# EAGLE board Print (EAGLE 9.5.0)
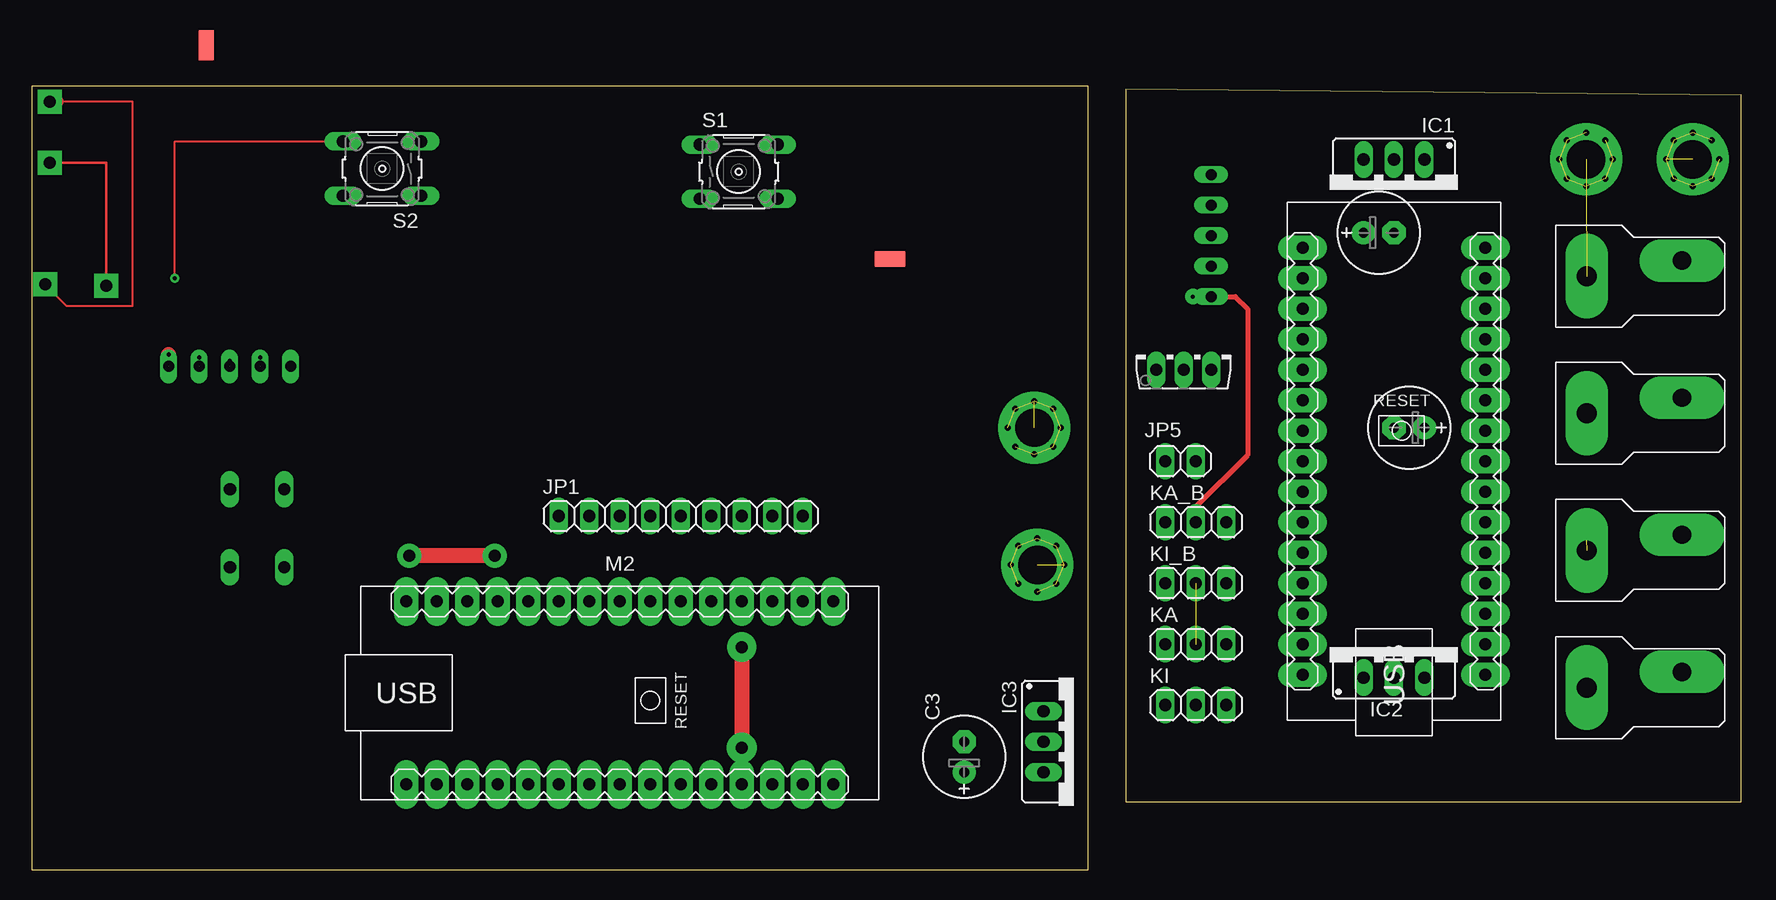
[diagram p0: board, top side]
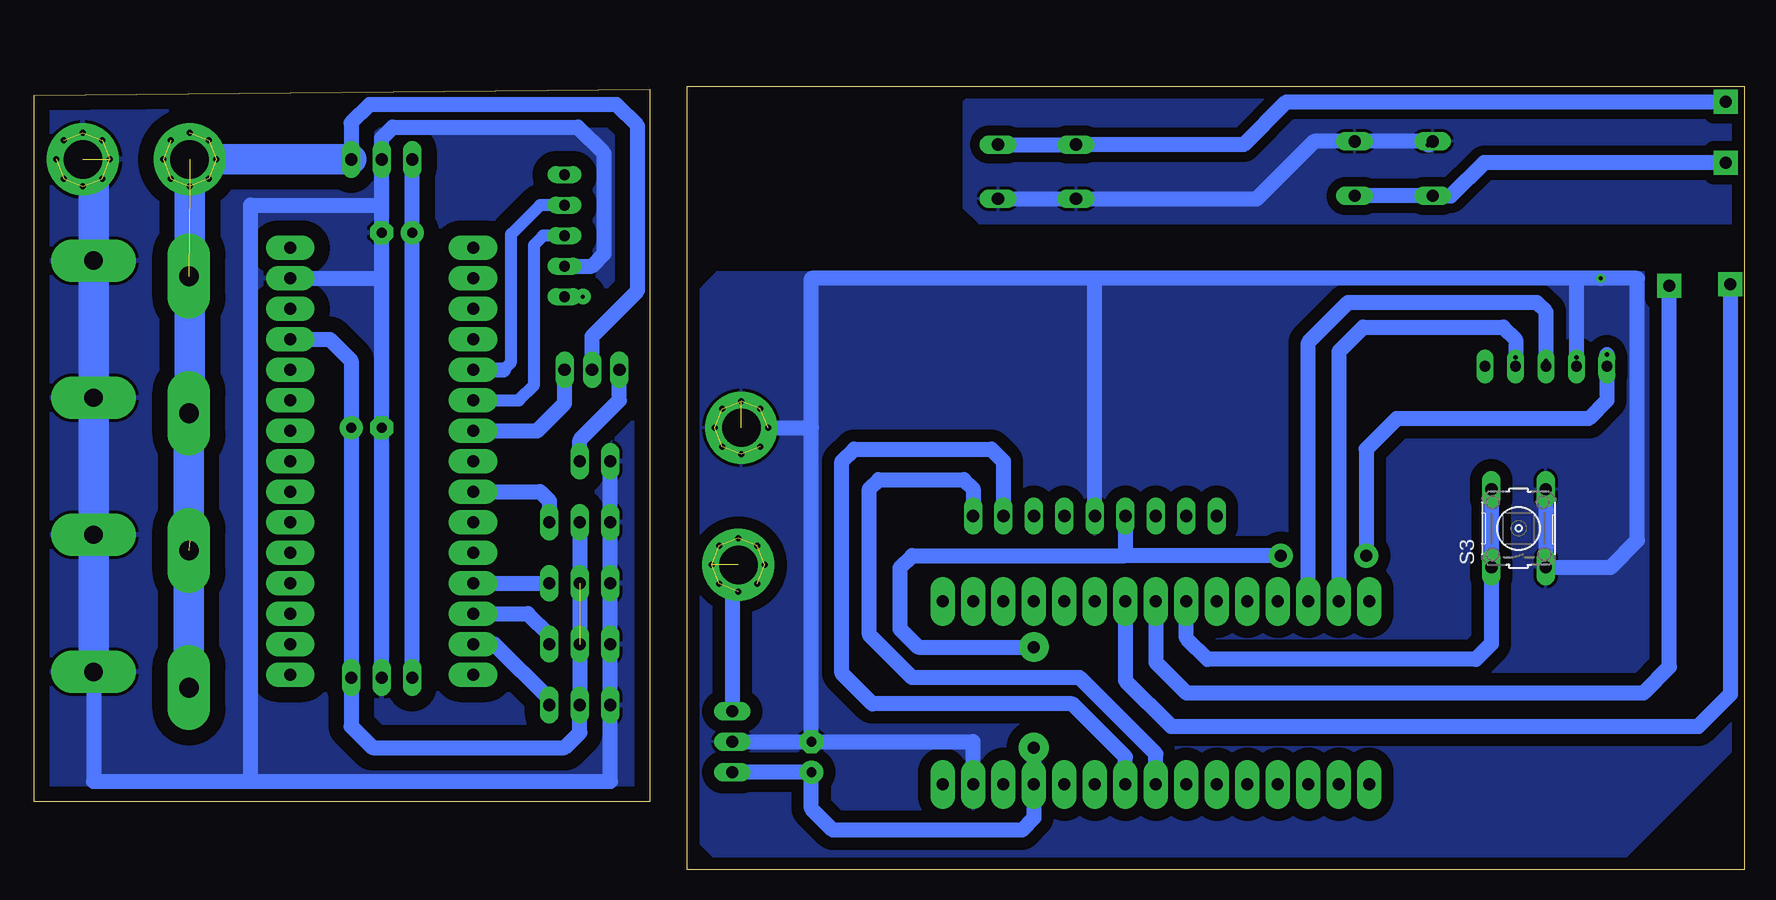
[diagram p1: board, bottom side, seen from below]

Size 142.49 x 65.27 mm. Coordinates in mm from the lower left corner, seen from the top.
Outline: 142.49,64.52 91.21,65.02 91.21,5.66 142.49,5.66 142.49,64.52
Outline: 0,0 88.06,0 88.06,65.27 0,65.27 0,0
Copper layers (1*16): Top 0.035mm / dielectric 1.5mm / Bottom 0.035mm
Design rules "default": minimum track width 6mil, minimum drill 0.35mm, track to track 24mil, track to pad 24mil, pad to pad 24mil, via to via 24mil, smd to smd 24mil, copper to edge 40mil, drill to drill 6mil, minimum pad ring 10mil, minimum via ring 8mil, stop-mask expansion 4mil, vias tented up to drill 0mil, thermal gap 10mil

## Footprints (pad centres in the part's own frame; a part is rotated, then mirrored left to right if it is on the bottom)
E2,5-7 = drill 0.813 pad 1.93: + -1.27,0 | drill 0.813 pad 1.93 octagon: - 1.27,0
3MM_HOLE = drill 3.2 pad 6: P$1 0,0 | drill 0.5 pad 0.61: P$2 0,2.223; P$3 0,-2.223; P$4 2.223,0; P$5 -2.223,0; P$6 -1.587,1.587; P$7 1.587,1.587; P$8 1.587,-1.587; P$9 -1.587,-1.587
78XXS = drill 1.016 long: GND 0,-2.54; IN -2.54,-2.54; OUT 2.54,-2.54
1X09 = drill 1.016 long: 1 -10.16,0; 2 -7.62,0; 3 -5.08,0; 4 -2.54,0; 5 0,0; 6 2.54,0; 7 5.08,0; 8 7.62,0; 9 10.16,0
1X02 = drill 1.016 long: 1 -1.27,0; 2 1.27,0
1X03 = drill 1.016 long: 1 -2.54,0; 2 0,0; 3 2.54,0
ARDUINO-NANO-3.0 = drill 1 pad 2.032 long: J1.1 17.78,7.62; J1.2 15.24,7.62; J1.3 12.7,7.62; J1.4 10.16,7.62; J1.5 7.62,7.62; J1.6 5.08,7.62; J1.7 2.54,7.62; J1.8 0,7.62; J1.9 -2.54,7.62; J1.10 -5.08,7.62; J1.11 -7.62,7.62; J1.12 -10.16,7.62; J1.13 -12.7,7.62; J1.14 -15.24,7.62; J1.15 -17.78,7.62; J2.1 17.78,-7.62; J2.2 15.24,-7.62; J2.3 12.7,-7.62; J2.4 10.16,-7.62; J2.5 7.62,-7.62; J2.6 5.08,-7.62; J2.7 2.54,-7.62; J2.8 0,-7.62; J2.9 -2.54,-7.62; J2.10 -5.08,-7.62; J2.11 -7.62,-7.62; J2.12 -10.16,-7.62; J2.13 -12.7,-7.62; J2.14 -15.24,-7.62; J2.15 -17.78,-7.62
TO126AV = drill 1.016 long: B 2.286,-1.27; C 0,-1.27; E -2.286,-1.27
B3F-10XX = drill 1.016 long: 1 -3.251,2.261; 2 3.251,2.261; 3 -3.251,-2.261; 4 3.251,-2.261
T_PLUG_CONNECTOR = drill 1.651 pad 3.531 long: P-1 2.6,4.248 | drill 1.524 pad 3.531 long: P-2 10.55,5.55
HC-12_FOOTPRINT = smd 2.54 x 1.27: ANT 25.49,7.03 | smd 0.406 x 0.203 bottom: GND -1.27,7.62; RXD -1.27,5.08; SET -1.27,0; TXD -1.27,2.54 | drill 0.9 pad 1.27 long: P$1 -1.27,10.16; P$2 -1.27,7.62; P$3 -1.27,5.08; P$4 -1.27,2.54; P$5 -1.27,0 | smd 0.305 x 0.152 bottom: VCC -1.27,10.16

## Placement (x,y rotation side)
C1  [E2,5-7]  112.27,53.09 0 top
C2  [E2,5-7]  114.81,36.83 180 top
C3  [E2,5-7]  77.72,9.4 90 top
H1  3MM_HOLE  [3MM_HOLE]  129.54,59.18 180 top
H2  3MM_HOLE  [3MM_HOLE]  138.43,59.18 180 top
H3  3MM_HOLE  [3MM_HOLE]  83.82,25.4 270 top
H4  3MM_HOLE  [3MM_HOLE]  83.57,36.83 0 top
IC1  [78XXS]  113.54,56.64 180 top
IC2  [78XXS]  113.54,18.54 0 top
IC3  [78XXS]  86.87,10.67 270 top
JP1  [1X09]  54.1,29.46 0 top
JP5  [1X02]  95.76,34.04 180 top
KA  [1X03]  97.03,18.8 0 top
KA_B  [1X03]  97.03,28.96 0 top
KI  [1X03]  97.03,13.72 0 top
KI_B  [1X03]  97.03,23.88 0 top
M1  ARDUINO-NANO-3.0  [ARDUINO-NANO-3.0]  113.54,34.04 90 top
M2  ARDUINO-NANO-3.0  [ARDUINO-NANO-3.0]  49.02,14.73 0 top
Q1  BD139  [TO126AV]  96.01,42.93 0 top
S1  [B3F-10XX]  58.93,58.17 0 top
S2  [B3F-10XX]  29.21,58.42 180 top
S3  [B3F-10XX]  18.8,28.45 90 bottom
U$1  T-PLUG_CONNECTOR  [T_PLUG_CONNECTOR]  127,45.21 0 top
U$2  T-PLUG_CONNECTOR  [T_PLUG_CONNECTOR]  127,33.78 0 top
U$3  T-PLUG_CONNECTOR  [T_PLUG_CONNECTOR]  127,22.35 0 top
U$4  T-PLUG_CONNECTOR  [T_PLUG_CONNECTOR]  127,10.92 0 top
U$5  HC-12_FOOTPRINT  [HC-12_FOOTPRINT]  97.03,57.91 180 top
U$6  HC-12_FOOTPRINT  [HC-12_FOOTPRINT]  21.59,43.21 90 top

## Library data of the parts
C1-C3 = rcl; SPICEPREFIX: C
H1-H4 = 3mm_special_hole
IC1-IC3 = v-reg
JP1 JP5 KA KA_B KI KI_B = pinhead
M1 M2 = diy-modules
Q1 = transistor-power
S1-S3 = switch-omron; MPN: B3F-1000; OC_FARNELL: 176432; OC_NEWARK: 36M3542
U$1-U$4 = con-T-plug
U$5 U$6 = hc12_433mhz

## Nets
3V1: M2.J2.14
3V3: M1.J2.14
5V: C2.+ IC2.OUT KA.2 KA_B.2 KI.2 KI_B.2 M1.J2.4 U$5.VCC
5V1: C3.+ IC3.OUT JP1.4 M2.J2.4 U$6.VCC
10: M2.J1.13 U$6.RXD
11: M2.J1.14 U$6.TXD
A4: JP1.9 M2.J2.8
A5: JP1.8 M2.J2.7
GND: C1.- C2.- H2.P$1 H2.P$2 H2.P$3 H2.P$4 H2.P$5 H2.P$6 H2.P$7 H2.P$8 H2.P$9 IC1.GND IC2.GND JP5.2 KA.1 KA_B.1 KI.1 KI_B.1 M1.J2.2 U$1.P-2 U$2.P-2 U$3.P-2 U$4.P-2 U$5.GND
GND1: C3.- H4.P$1 H4.P$2 H4.P$3 H4.P$4 H4.P$5 H4.P$6 H4.P$7 H4.P$8 H4.P$9 IC3.GND JP1.5 M2.J2.2 S1.3 S1.4 S2.3 S2.4 S3.3 S3.4 U$6.GND
GND.1: M1.J1.4
GND.2: M2.J1.4
MAJU: M2.J1.7 S1.1 S1.2
MUNDUR: M2.J1.8 S2.1 S2.2
N$2: C1.+ IC1.OUT IC2.IN
N$4: M1.J2.1
N$5: JP5.1 Q1.E
N$8: U$5.SET
PIN_6: KA_B.3 M1.J1.9
PIN_9: KI_B.3 M1.J1.12
PIN_10: KA.3 M1.J1.13
PIN_11: KI.3 M1.J1.14
PUMP: M1.J1.7 Q1.B
PUMP1: M2.J1.9 S3.1 S3.2
RXD: M1.J1.6 U$5.RXD
TXD: M1.J1.5 U$5.TXD
VCC: H1.P$1 H1.P$2 H1.P$3 H1.P$4 H1.P$5 H1.P$6 H1.P$7 H1.P$8 H1.P$9 IC1.IN Q1.C U$1.P-1 U$2.P-1 U$3.P-1 U$4.P-1
VCC1: H3.P$1 H3.P$2 H3.P$3 H3.P$4 H3.P$5 H3.P$6 H3.P$7 H3.P$8 H3.P$9 IC3.IN
VIN: M2.J2.1

## Tracks (layer width: path | path; a pad name or v marks a point on that pad's centre or on a via)
5V  (via drill 0.35 pad 1.3)  (1 unrouted)
  Top 0.406: KA_B.2 97.03,30.23 101.35,34.54 101.35,46.74 100.33,47.75 v96.77,47.75
  Bottom 0.406: U$5.VCC v96.77,47.75
  Bottom 1.27: M1.J2.4 117.86,44.2 116.08,42.42 C2.+ IC2.OUT 116.08,11.94 114.3,10.16 98.3,10.16 97.03,11.43 KI.2 KI_B.2 KA_B.2
5V1  (via drill 0.35, 1 pad 2, 1 pad 2.45, 1 pad 2.5)  (1 unrouted)
  Top 1.27: U$6.VCC v11.43,42.93 | v59.18,18.54 v59.18,10.16 | v38.61,26.16 v31.5,26.16
  Bottom 1.27: JP1.4 51.56,26.16 | v59.18,18.54 68.83,18.54 70.36,20.07 70.36,25.15 69.34,26.16 51.56,26.16 | v59.18,10.16 M2.J2.4 59.18,4.32 60.2,3.3 75.95,3.3 77.72,5.08 C3.+ IC3.OUT | v11.43,42.93 11.43,39.12 12.95,37.59 28.96,37.59 31.5,35.05 v31.5,26.16 | v38.61,26.16 51.56,26.16
10  (via drill 0.35)  (1 unrouted)
  Top 1.27: U$6.RXD v16.51,42.42
  Bottom 1.27: M2.J1.13 36.32,43.94 33.02,47.24 17.27,47.24 16.51,46.48 v16.51,42.42
11  (via drill 0.35)  (1 unrouted)
  Top 1.27: U$6.TXD v19.05,42.67
  Bottom 1.27: v19.05,42.67 19.05,44.2 20.07,45.21 31.75,45.21 33.78,43.18 M2.J1.14
A4
  Bottom 1.27: M2.J2.8 49.02,9.65 55.37,16 69.34,16 72.9,19.56 72.9,31.75 72.14,32.51 65.02,32.51 64.26,31.75 JP1.9
A5
  Bottom 1.27: M2.J2.7 51.56,9.4 55.98,13.82 72.64,13.82 75.18,16.36 75.18,34.04 74.17,35.05 62.74,35.05 61.72,34.04 JP1.8
GND  (8 unrouted)
  Bottom 1.27: IC2.GND C2.- 113.54,49.28 | 113.54,49.28 C1.- 113.54,55.37 | 113.54,55.37 IC1.GND 113.54,60.96 112.62,61.87 97.18,61.87 95,59.69 95,51.31 96.01,50.29 U$5.GND | M1.J2.2 113.54,49.28 | U$4.P-2 137.55,7.37 124.46,7.37 | 124.46,7.37 94.49,7.37 KI.1 KA.1 KI_B.1 KA_B.1 JP5.2 | 124.46,7.37 124.46,55.37 113.54,55.37
  Bottom 2.54: U$4.P-2 U$3.P-2 U$2.P-2 137.55,49.9 137.41,50.04 137.41,50.63 U$1.P-2 137.55,58.3 H2.P$1
  pour Bottom (isolate 1.27): 142.24,5.84 91.44,5.84 91.44,64.26 142.24,64.26
GND1  (via drill 0.35)  (9 unrouted)
  Top 0.152: v11.94,49.28 11.94,60.68 S2.4
  Top 1.27: U$6.GND v13.97,42.67
  Bottom 1.27: IC3.GND C3.- | M2.J2.2 64.26,10.67 C3.- | v13.97,42.67 13.97,49.28 | 13.97,49.28 53.85,49.28 | 53.85,49.28 77.72,49.28 77.72,36.83 | C3.- 77.72,36.83 | JP1.5 54.1,49.02 53.85,49.28 | 13.97,49.28 v11.94,49.28 8.89,49.28 8.89,27.43 11.12,25.2 S3.3 S3.4 | S1.4 S1.3 55.65,55.88 40.64,55.88 35.84,60.68 S2.3 S2.4 26.26,60.38 v26.34,60.38 | H4.P$1 77.72,36.83
  pour Bottom (isolate 1.016): 0.25,49.78 85.6,49.78 87.88,47.5 87.88,3.05 85.09,0.25 10.67,0.25 0.25,10.67
  pour Bottom (isolate 0.813): 0.51,65.02 64.01,65.02 65.02,64.01 65.02,55.12 63.75,53.85 0.51,53.85
MAJU  (via drill 1 pad 2)
  Top 0.152: 2.03,64.01 8.43,64.01 8.43,46.95 2.96,46.95 v1.14,48.77
  Top 1.27: 2.03,64.01 v1.52,64.01
  Bottom 1.27: M2.J1.7 51.56,15.75 47.75,11.94 3.81,11.94 1.14,14.6 v1.14,48.77 | S1.2 S1.1 41.71,60.43 38.15,63.98 1.55,63.98 v1.52,64.01
MUNDUR  (via drill 1 pad 2)
  Top 0.203: v1.52,58.93 6.22,58.93 v6.22,48.64
  Bottom 1.27: M2.J1.8 49.02,17.27 46.48,14.73 8.38,14.73 6.22,16.89 v6.22,48.64 | S2.1 S2.2 24.43,56.16 21.67,58.93 v1.52,58.93
N$2
  Bottom 1.27: IC2.IN C1.+ IC1.OUT
N$5
  Bottom 1.27: JP5.1 97.03,35.81 93.73,39.12 Q1.E
PIN_6
  Bottom 1.27: M1.J1.9 100.33,31.5 99.57,30.73 KA_B.3
PIN_9
  Bottom 1.27: M1.J1.12 KI_B.3
PIN_10
  Bottom 1.27: M1.J1.13 101.35,21.34 99.57,19.56 KA.3
PIN_11
  Bottom 1.27: M1.J1.14 104.14,18.8 99.57,14.22 KI.3
PUMP
  Bottom 1.27: M1.J1.7 100.58,36.58 98.3,38.86 Q1.B
PUMP1
  Bottom 1.27: M2.J1.9 46.48,19.3 44.7,17.53 22.35,17.53 21.06,18.82 S3.1 S3.2
RXD
  Bottom 1.016: M1.J1.6 102.11,39.12 100.84,40.39 100.84,52.07 100.08,52.83 U$5.RXD
TXD
  Bottom 1.016: 103.38,41.66 102.74,42.29 102.74,52.96 100.33,55.37 U$5.TXD
  Bottom 1.27: M1.J1.5 103.38,41.66
VCC  (10 unrouted)
  Bottom 1.27: Q1.C 96.01,44.45 92.2,48.26 92.2,61.98 93.98,63.75 114.55,63.75 116.08,62.23 IC1.IN
  Bottom 2.54: U$4.P-1 129.6,27.37 129.54,27.43 | U$3.P-1 U$2.P-1 129.54,38.09 H1.P$1 IC1.IN
VCC1  (8 unrouted)
  Bottom 1.27: IC3.IN 84.33,24.89 H3.P$1